# Altium PCB ICAN-7006-AiUi.PcbDoc
Units mm, origin at the board's own origin, x right, y up, seen from the top; angles counter-clockwise.
Board outline 118 x 80 mm, 2 copper layers (Top Layer, Bottom Layer); 50 components, 68 nets, 272 pads, 0 vias.
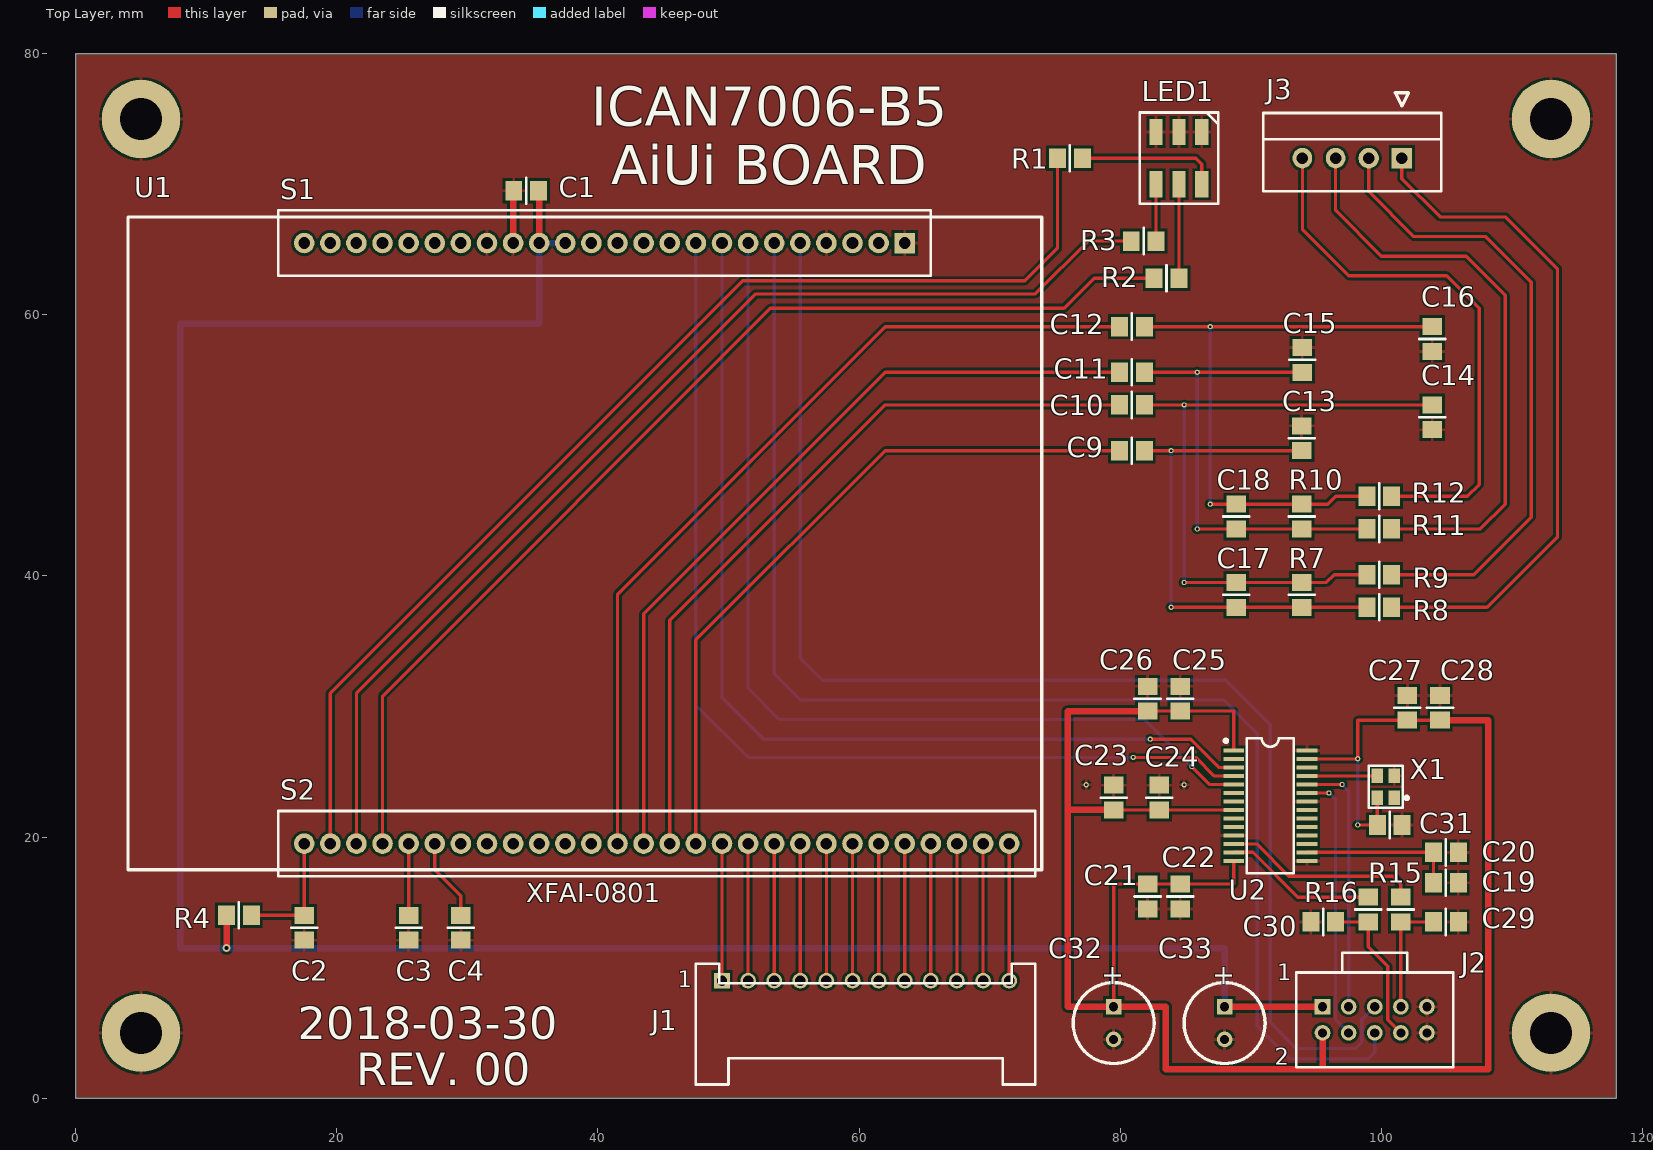
[diagram p0: Top Layer view]
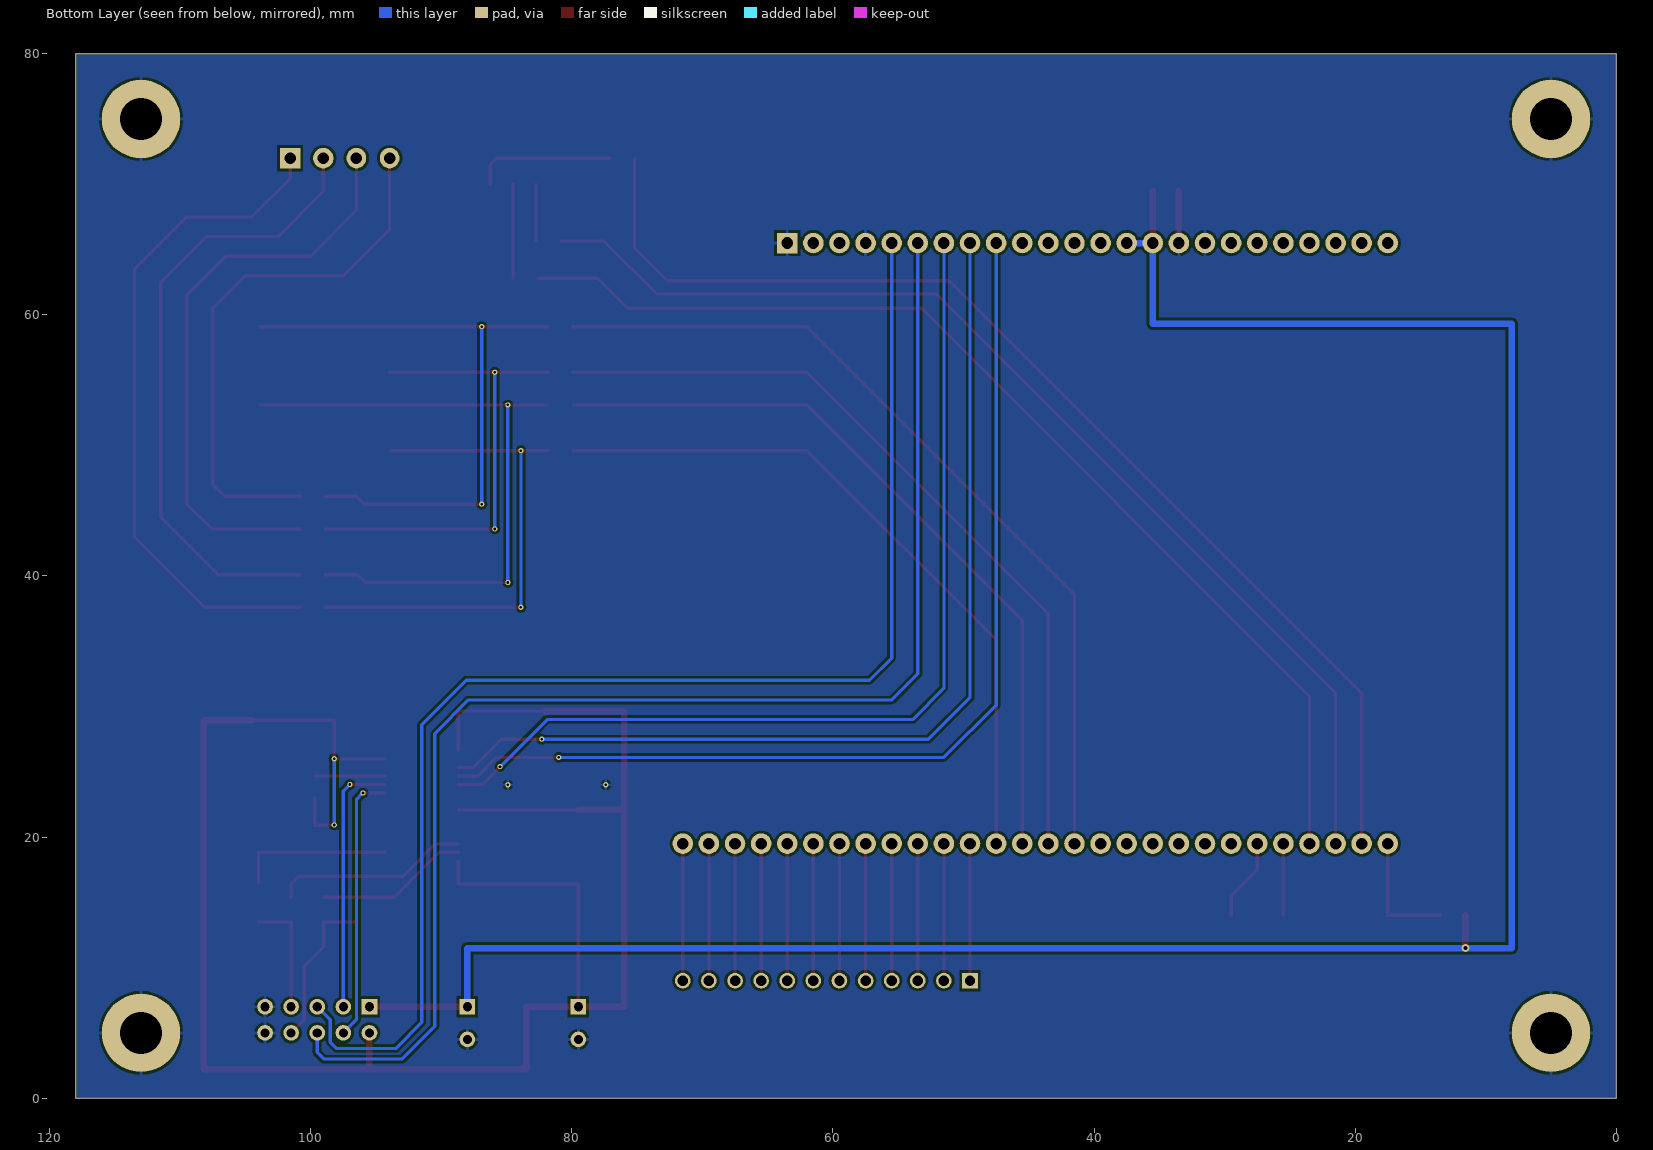
[diagram p1: Bottom Layer view, seen from below]

## Layer stack, top to bottom
Top Layer: signal copper 0.0356
Dielectric: dielectric 0.32, FR-4, Dk 4.8
Bottom Layer: signal copper 0.0356

## Board outline
0,0 0,80 118,80 118,0

## Design rules (kind name [scope] priority, off if disabled: settings)
Clearance [All] p1: gap=0.2
ComponentClearance [All] p1: gap=0.2 collisioncheckmode=3 verticalgap=0.2
HoleSize [All] p1: absolutevalues=TRUE maxlimit=8 minlimit=0.025 maxpercent=80.000 minpercent=20.000
PolygonConnect [All] p1: connectstyle=Relief reliefconductorwidth=0.254 reliefentries=4 polygonreliefangle="90 Angle"
RoutingVias [All] p1: holewidth=0.2 width=0.4 viastyle="Through Hole" minholewidth=0.2 minwidth=0.4 maxholewidth=4 maxwidth=8
SolderMaskExpansion [All] p1: expansion=0.102
TestPointUsage [All] p1: valid=0 allowmultiple=FALSE
Testpoint [All] p1: side=15 testpointundercomponent=TRUE minsize=1.016 maxsize=2.54 preferedsize=1.524 minholesize=0 maxholesize=1.016 preferedholesize=0.813 testpointgrid=0.025 style=1023 order=0-112345678
Width [All] p1: maxlimit=2 minlimit=0.2 preferedwidth=0.254
17 further rules are at their usual default settings.

## Components (designator, comment, footprint, x,y, rotation, side; value= is the part's Value field where it differs from the comment)
C1 "10uF" [0805]2012 34.5,69.5 r180 top
C2 "100nF" [0805]2012 17.5,13.05 r90 top
C3 "100nF" [0805]2012 25.5,13.05 r90 top
C4 "100nF" [0805]2012 29.5,13.05 r90 top
C9 "1uF" [0805]2012 80.9,49.6 r0 top
C10 "1uF" [0805]2012 80.9,53.1 r0 top
C11 "1uF" [0805]2012 80.9,55.6 r0 top
C12 "1uF" [0805]2012 80.9,59.1 r0 top
C13 "1nF" [0805]2012 93.9,50.55 r270 top
C14 "1nF" [0805]2012 103.9,52.15 r90 top
C15 "1nF" [0805]2012 93.95,56.55 r270 top
C16 "1nF" [0805]2012 103.9,58.15 r90 top
C17 "1nF" [0805]2012 88.9,38.55 r270 top
C18 "1nF" [0805]2012 88.9,44.55 r270 top
C19 "0.1uF" [0805]2012 104.95,16.5 r180 top
C20 "10uF" [0805]2012 104.95,18.825 r180 top
C21 "0.1uF" [0805]2012 82.1,15.45 r90 top
C22 "10uF" [0805]2012 84.6,15.45 r90 top
C23 "0.1uF" [0805]2012 79.5,23.025 r270 top
C24 "10uF" [0805]2012 83,23.025 r270 top
C25 "0.1uF" [0805]2012 84.6,30.6 r270 top
C26 "10uF" [0805]2012 82.1,30.6 r270 top
C27 "0.1uF" [0805]2012 102,29.9 r270 top
C28 "10uF" [0805]2012 104.5,29.9 r270 top
C29 "2.2nF" [0805]2012 104.95,13.5 r180 top
C30 "2.2nF" [0805]2012 95.55,13.5 r0 top
C31 "0.01uF" [0805]2012 100.65,20.925 r180 top
C32 "47uF/25V" "Capa MH5 PITCH2.5mm" 79.5,5.75 r270 top
C33 "47uF/25V" "Capa MH5 PITCH2.5mm" 88,5.75 r270 top
J1 "YH 12P" HY-12AW 60.5,9 r0 top
J2 "PHSD 10P" "PHSD WV05x2" 99.5,6 r0 top
J3 "C3 4P" C3-S4 101.58,72 r0 top
LED1 "GB-T500RGB" "LED SMD RGB" 84.5,72 r270 top
R1 "2.2k,1/4W" [0805]2012 76.15,72 r180 top
R2 "3k,1/4W" [0805]2012 83.55,62.8 r180 top
R3 "2.2k,1/4W" [0805]2012 81.8,65.65 r180 top
R4 "100k,1/8W" [0805]2012 12.5,14 r0 top
R7 "1k,1/8W" [0805]2012 93.9,38.55 r270 top
R8 "10k,1/8W" [0805]2012 99.85,37.6 r0 top
R9 "10k,1/8W" [0805]2012 99.85,40.1 r0 top
R10 "1k,1/8W" [0805]2012 93.9,44.55 r270 top
R11 "10k,1/8W" [0805]2012 99.85,43.6 r0 top
R12 "10k,1/8W" [0805]2012 99.85,46.1 r0 top
R15 "470,1/4W" [0805]2012 101.5,14.45 r270 top
R16 "470,1/4W" [0805]2012 99,14.45 r270 top
S1 "SOCKET 24P" "CONN 2.0mm X 24" 36.5,65.5 r270 top
S2 "SOCKET 28P" "CONN 2.0mm X 28" 44.5,19.5 r270 top
U1 "XFAI-0801" XFAI-0801 44.5,42.5 r270 top
U2 "TLV320AIC23BIPW" "PW 28p" 91.5,22.4 r270 top
X1 "SG-210STF 12.00MHz" "XTAL SPXO" 100.35,23.85 r90 top

## Footprints (in the part's own frame and the unit in brackets; to place one, negate y for a bottom-side part, rotate by r counter-clockwise, add the part's x,y. Pads: shape width x height; smd on the part's side, far side on the other; paste and mask are expansions set on the pad)
[0805]2012 [mm] "SMD 2.0x1.25"
  rect 1.3x1.5 smd: 1(-0.95,0) 2(0.95,0)
  silkscreen extent 0,-1 0,1
C3-S4 [mm] "2.54"
  rect 1.575x1.575 hole 0.89: 1(0,0)
  round 1.575 hole 0.89: 2(-2.54,0)
  oval 1.5x1.575 hole 0.89: 3(-5.08,0) 4(-7.62,0)
  silkscreen extent -10.62,-2.54 3,5
"Capa MH5 PITCH2.5mm" [mm] "Capacitor, Electrolytic, Radial; Body 6.3 mm (Dia.xH typ); Pin Spacing 2.5 mm (typ)"
  rect 1.2x1.2 hole 0.7: 1(-1.25,0)
  round 1.2 hole 0.7: 2(1.25,0)
  silkscreen extent -3.1,-3.1 3.1,3.1
"CONN 2.0mm X 24" [mm]
  round 1.575 hole 0.89: 1(0,27) 2(0,25) 3(0,23) 4(0,21) 5(0,19) 6(0,17) 7(0,15) 8(0,13) 9(0,11) 10(0,9) 11(0,7) 12(0,5) 13(0,3) 14(0,1) 15(0,-1) 16(0,-3) 17(0,-5) 18(0,-7) 19(0,-9) 20(0,-11) 21(0,-13) 22(0,-15) 23(0,-17) 24(0,-19)
  silkscreen extent -2.5,-21 2.5,29
"CONN 2.0mm X 28" [mm]
  round 1.575 hole 0.89: 1(0,27) 2(0,25) 3(0,23) 4(0,21) 5(0,19) 6(0,17) 7(0,15) 8(0,13) 9(0,11) 10(0,9) 11(0,7) 12(0,5) 13(0,3) 14(0,1) 15(0,-1) 16(0,-3) 17(0,-5) 18(0,-7) 19(0,-9) 20(0,-11) 21(0,-13) 22(0,-15) 23(0,-17) 24(0,-19) 25(0,-21) 26(0,-23) 27(0,-25) 28(0,-27)
  silkscreen extent -2.5,-29 2.5,29
HY-12AW [mm] "YOLINK PHB CONNECTOR A2006-xxA 2.00mm"
  rect 1.2x1.2 hole 0.8: 1(-11,0)
  round 1.2 hole 0.8: 2(-9,0) 3(-7,0) 4(-5,0) 5(-3,0) 6(-1,0) 7(1,0) 8(3,0) 9(5,0) 10(7,0) 11(9,0) 12(11,0)
  silkscreen extent -13,-7.95 13,1.3
"LED SMD RGB" [mm] "Body 5x5mm 3LED"
  rect 2x1 smd: 1(-2,1.75) 2(-2,0) 3(-2,-1.75) 4(2,-1.75) 5(2,0) 6(2,1.75)
  silkscreen extent -3.5,-3 3.5,3
"PHSD WV05x2" [mm] "YOLINK PHSD CONNECTOR A2006-WVxxX2 2.00mm"
  rect 1.2x1.2 hole 0.7: 1(-4,1)
  round 1.2 hole 0.7: 2(-4,-1) 3(-2,1) 4(-2,-1) 5(0,1) 6(0,-1) 7(2,1) 8(2,-1) 9(4,1) 10(4,-1)
  silkscreen extent -6,-3.62 6,5.13
"PW 28p" [mm] "pitch 0.65mm TI"
  rect 0.3x1.6 smd: 1(-4.225,-2.8) 2(-3.575,-2.8) 3(-2.925,-2.8) 4(-2.275,-2.8) 5(-1.625,-2.8) 6(-0.975,-2.8) 7(-0.325,-2.8) 8(0.325,-2.8) 9(0.975,-2.8) 10(1.625,-2.8) 11(2.275,-2.8) 12(2.925,-2.8) 13(3.575,-2.8) 14(4.225,-2.8) 15(4.225,2.8) 16(3.575,2.8) 17(2.925,2.8) 18(2.275,2.8) 19(1.625,2.8) 20(0.975,2.8) 21(0.325,2.8) 22(-0.325,2.8) 23(-0.975,2.8) 24(-1.625,2.8) 25(-2.275,2.8) 26(-2.925,2.8) 27(-3.575,2.8) 28(-4.225,2.8)
  silkscreen extent -5.18,-3.52 5.17,1.8
XFAI-0801 [mm]
  rect 1.575x1.575 hole 0.89: 1(-23,19)
  round 1.575 hole 0.89: 2(-23,17) 3(-23,15) 4(-23,13) 5(-23,11) 6(-23,9) 7(-23,7) 8(-23,5) 9(-23,3) 10(-23,1) 11(-23,-1) 12(-23,-3) 13(-23,-5) 14(-23,-7) 15(-23,-9) 16(-23,-11) 17(-23,-13) 18(-23,-15) 19(-23,-17) 20(-23,-19) 21(-23,-21) 22(-23,-23) 23(-23,-25) 24(-23,-27) 25(23,-27) 26(23,-25) 27(23,-23) 28(23,-21) 29(23,-19) 30(23,-17) 31(23,-15) 32(23,-13) 33(23,-11) 34(23,-9) 35(23,-7) 36(23,-5) 37(23,-3) 38(23,-1) 39(23,1) 40(23,3) 41(23,5) 42(23,7) 43(23,9) 44(23,11) 45(23,13) 46(23,15) 47(23,17) 48(23,19) 49(23,21) 50(23,23) 51(23,25) 52(23,27)
  silkscreen extent -25,-40.5 25,29.5
"XTAL SPXO" [mm] "EPSON SG-210STF"
  rect 1.1x0.9 smd: 1(-0.85,-0.65) 2(0.85,-0.65) 3(0.85,0.65) 4(-0.85,0.65)
  silkscreen extent -1.6,-1.73 1.6,1.3

## Part data
C1 C2 C3 C4 C9 C10 C11 C12 C13 C14 C15 C16 C17 C18 C31: library part "Cap Semi", "Capacitor (Semiconductor SIM Model)"
C19 C20 C21 C22 C23 C24 C25 C26 C27 C28 C29 C30: library part "Cap Semi", "Capacitor"
C32 C33: library part "Cap Pol2", "Polarized Capacitor (Axial)"
J1: library part "Header 20", "Header, 20-Pin"
J2 J3: library part "Header 4", "Header, 4-Pin"
LED1: "LED RGB"
R1 R2 R3 R4 R7 R8 R9 R10 R11 R12 R15 R16: library part Res3, "Resistor"
S1 S2: "IC SOCKET"
U2: library part IC28, "DAC"
X1: library part IC4, "Crystal oscilator"

## Free pads (board coordinates)
  round 6 hole 3.2: 0(5,5) 0(5,75) 0(113,5) 0(113,75)
  round 0.6 hole 0.3: 0(11.55,11.5)
  round 0.4 hole 0.2: 0(77.4,24) 0(81,26.1) 0(82.3,27.5) 0(83.9,37.6) 0(83.9,49.6) 0(84.9,39.5) 0(84.9,53.1) 0(84.9,24) 0(85.5,25.4) 0(85.9,43.6) 0(85.9,55.6) 0(86.9,45.5) 0(86.9,59.1) 0(96,23.375) 0(97,24.025) 0(98.2,20.925) 0(98.2,26)

## Nets (pads, with @x,y where several pads share a name; then routed paths per layer and width w, separated by ;. In a path a pad name is that pad's centre, name@x,y a point inside that pad or via, vN(x,y) a via of type N, cw(c..) or ccw(c..) an arc to the next point about the centre after c; other vN are vias at no path point)
DC3.3V: C21.2 C22.2 C23.2 C24.2 C25.2 C26.2 C27.2 C28.2 C31.2 C32.1 J2.2 pad.0@98.2,20.925 pad.0@98.2,26 U2.1 U2.8 U2.14 U2.27 X1.4 | length 163.4
  Top Layer w0.254: C32.1 79.5,16.3 ; 79.5,16.4 88.7,16.4 U2.14 ; C23.2 U2.8 ; C26.2 88.7,29.65 U2.1 ; U2.27 98.2,25.975 98.2,28.95 C28.2 ; pad.0@98.2,20.925 C31.2 X1.4
  Top Layer w0.5: 76,22.075 C23.2 ; C26.2 76,29.65 76,7 83.5,7 83.5,2.2 108.2,2.2 108.2,28.95 C28.2 ; 95.5,2.2 J2.2
  Bottom Layer w0.254: pad.0@98.2,20.925 pad.0@98.2,26
DC5V: C1.1 C33.1 J2.1 pad.0@11.55,11.5 R4.1 S1.14 S1.15 U1.14 U1.15 | length 182
  Top Layer w0.5: pad.0@11.55,11.5 R4.1 ; U1.15 C1.1@35.5,69.5 ; C33.1 J2.1
  Bottom Layer w0.5: U1.14 U1.15 35.5,59.3 8,59.3 8,11.498 88,11.498 C33.1
GND: C1.2 C2.1 C3.1 C4.1 C13.1 C14.1 C15.1 C16.1 C19.1 C20.1 C21.1 C22.1 C23.1 C24.1 C25.1 C26.1 C27.1 C28.1 C29.1 C30.1 C31.1 C32.2 C33.2 J2.9 J2.10 LED1.1 LED1.2 LED1.3 pad.0@5,5 pad.0@5,75 pad.0@77.4,24 pad.0@84.9,24 pad.0@113,5 pad.0@113,75 S1.1 S1.4 S1.16 S1.17 U1.1 U1.4 U1.16 U1.17 U2.11 U2.15 U2.22 U2.28 X1.2 | length 4
  Top Layer w0.5: U1.16 C1.2@33.5,69.5
I2C_SCL2: J2.3 pad.0@97,24.025 U2.24 | length 19.9
  Top Layer w0.254: U2.24 pad.0@97,24.025
  Bottom Layer w0.254: pad.0@97,24.025 97.5,23.525 J2.3
I2C_SDA2: J2.4 pad.0@96,23.375 U2.23 | length 20.7
  Top Layer w0.254: U2.23 pad.0@96,23.375
  Bottom Layer w0.254: pad.0@96,23.375 96.5,22.875 96.5,6 J2.4
NetC2_2: C2.2 R4.2 S2.28 U1.25 | length 9.5
  Top Layer w0.254: R4.2 C2.2 U1.25
NetC3_2: C3.2 S2.24 U1.29 | length 5.5
  Top Layer w0.254: C3.2 U1.29
NetC4_2: C4.2 S2.23 U1.30 | length 6.3
  Top Layer w0.254: U1.30 27.5,17.5 29.5,15.5 C4.2
NetC9_1: C9.1 S2.13 U1.40 | length 54.1
  Top Layer w0.254: U1.40 47.5,35.1 62,49.6 C9.1
NetC9_2: C9.2 C13.2 C17.2 pad.0@83.9,37.6 pad.0@83.9,49.6 R7.2 R8.1 | length 39.1
  Top Layer w0.254: C9.2 C13.2 ; pad.0@83.9,37.6 R8.1
  Bottom Layer w0.254: pad.0@83.9,37.6 pad.0@83.9,49.6
NetC10_1: C10.1 S2.14 U1.39 | length 58.4
  Top Layer w0.254: U1.39 45.5,36.6 62,53.1 C10.1
NetC10_2: C10.2 C14.2 C17.1 pad.0@84.9,39.5 pad.0@84.9,53.1 R7.1 R9.1 | length 49.8
  Top Layer w0.254: C10.2 C14.2 ; pad.0@84.9,39.5 R7.1@93.8,39.5 ; R7.1 95.8,39.5 96.4,40.1 R9.1
  Bottom Layer w0.254: pad.0@84.9,39.5 pad.0@84.9,53.1
NetC11_1: C11.1 S2.15 U1.38 | length 61.7
  Top Layer w0.254: U1.38 43.5,37.1 62,55.6 C11.1
NetC11_2: C11.2 C15.2 C18.2 pad.0@85.9,43.6 pad.0@85.9,55.6 R10.2 R11.1 | length 37.1
  Top Layer w0.254: C11.2 C15.2 ; pad.0@85.9,43.6 R11.1
  Bottom Layer w0.254: pad.0@85.9,43.6 pad.0@85.9,55.6
NetC12_1: C12.1 S2.16 U1.37 | length 66
  Top Layer w0.254: U1.37 41.5,38.6 62,59.1 C12.1
NetC12_2: C12.2 C16.2 C18.1 pad.0@86.9,45.5 pad.0@86.9,59.1 R10.1 R12.1 | length 47.9
  Top Layer w0.254: C12.2 C16.2 ; pad.0@86.9,45.5 95.9,45.5 96.5,46.1 R12.1
  Bottom Layer w0.254: pad.0@86.9,45.5 pad.0@86.9,59.1
NetC19_2: C19.2 C20.2 U2.16 | length 12
  Top Layer w0.254: U2.16 C20.2 C19.2
NetC29_2: C29.2 J2.7 R15.2 | length 9
  Top Layer w0.254: J2.7 R15.2 C29.2
NetC30_2: C30.2 J2.8 R16.2 | length 12
  Top Layer w0.254: C30.2 R16.2 99,11.6 100.5,10.1 100.5,6 J2.8
NetJ1_1: J1.1 S2.12 U1.41 | length 10.5
  Top Layer w0.254: J1.1 U1.41
NetJ1_2: J1.2 S2.11 U1.42 | length 10.5
  Top Layer w0.254: J1.2 U1.42
NetJ1_3: J1.3 S2.10 U1.43 | length 10.5
  Top Layer w0.254: J1.3 U1.43
NetJ1_4: J1.4 S2.9 U1.44 | length 10.5
  Top Layer w0.254: J1.4 U1.44
NetJ1_5: J1.5 S2.8 U1.45 | length 10.5
  Top Layer w0.254: J1.5 U1.45
NetJ1_6: J1.6 S2.7 U1.46 | length 10.5
  Top Layer w0.254: J1.6 U1.46
NetJ1_7: J1.7 S2.6 U1.47 | length 10.5
  Top Layer w0.254: J1.7 U1.47
NetJ1_8: J1.8 S2.5 U1.48 | length 10.5
  Top Layer w0.254: J1.8 U1.48
NetJ1_9: J1.9 S2.4 U1.49 | length 10.5
  Top Layer w0.254: J1.9 U1.49
NetJ1_10: J1.10 S2.3 U1.50 | length 10.5
  Top Layer w0.254: J1.10 U1.50
NetJ1_11: J1.11 S2.2 U1.51 | length 10.5
  Top Layer w0.254: J1.11 U1.51
NetJ1_12: J1.12 S2.1 U1.52 | length 10.5
  Top Layer w0.254: J1.12 U1.52
NetJ3_1: J3.1 R8.2 | length 51.8
  Top Layer w0.254: R8.2 108.1,37.6 113.5,43 113.5,63.5 109.5,67.5 104.5,67.5 101.58,70.42 J3.1
NetJ3_2: J3.2 R9.2 | length 48.4
  Top Layer w0.254: J3.2 99.04,69.46 102.5,66 108,66 111.5,62.5 111.5,44.5 107.1,40.1 R9.2
NetJ3_3: J3.3 R11.2 | length 45.2
  Top Layer w0.254: J3.3 96.5,68 100,64.5 106.5,64.5 109.5,61.5 109.5,45.5 107.6,43.6 R11.2
NetJ3_4: J3.4 R12.2 | length 42.1
  Top Layer w0.254: J3.4 93.96,66.54 97.5,63 105,63 107.5,60.5 107.5,47 106.6,46.1 R12.2
NetLED1_4: LED1.4 R3.1 | length 4.4
  Top Layer w0.254: R3.1 LED1.4
NetLED1_5: LED1.5 R2.1 | length 7.2
  Top Layer w0.254: R2.1 LED1.5
NetLED1_6: LED1.6 R1.1 | length 10.9
  Top Layer w0.254: R1.1 85.8,72 86.25,71.55 LED1.6
NetR1_2: R1.2 S2.27 U1.26 | length 88.2
  Top Layer w0.254: U1.26 19.5,31 51.1,62.6 72.7,62.6 75.2,65.1 R1.2
NetR2_2: R2.2 S2.25 U1.28 | length 83.7
  Top Layer w0.254: U1.28 23.5,30.8 53.2,60.5 75.7,60.5 78,62.8 R2.2
NetR3_2: R3.2 S2.26 U1.27 | length 85.2
  Top Layer w0.254: U1.27 21.5,31 52.1,61.6 73.5,61.6 77.55,65.65 R3.2
NetS1_2: S1.2 U1.2
NetS1_3: S1.3 U1.3
NetS1_10: S1.10 U1.10
NetS1_11: S1.11 U1.11
NetS1_12: S1.12 U1.12
NetS1_13: S1.13 U1.13
NetS1_20: S1.20 U1.20
NetS1_21: S1.21 U1.21
NetS1_22: S1.22 U1.22
NetS1_23: S1.23 U1.23
NetS1_24: S1.24 U1.24
NetS2_17: S2.17 U1.36
NetS2_18: S2.18 U1.35
NetS2_19: S2.19 U1.34
NetS2_20: S2.20 U1.33
NetS2_21: S2.21 U1.32
NetS2_22: S2.22 U1.31
NetU2_25: U2.25 X1.3 | length 5.4
  Top Layer w0.254: U2.25 X1.3@99.7,24.675
PCM-CK: pad.0@82.3,27.5 S1.8 U1.8 U2.3 | length 76.2
  Top Layer w0.254: pad.0@82.3,27.5 85.4,27.5 87.575,25.325 U2.3
  Bottom Layer w0.254: U1.8 49.5,30.7 52.7,27.5 pad.0@82.3,27.5
PCM-DI: pad.0@81,26.1 S1.9 U1.9 U2.4 | length 78.8
  Top Layer w0.254: pad.0@81,26.1 85.8,26.1 87.225,24.675 U2.4
  Bottom Layer w0.254: U1.9 47.5,30.1 51.5,26.1 pad.0@81,26.1
PCM-LRCK: pad.0@85.5,25.4 S1.7 U1.7 U2.5 | length 74.4
  Top Layer w0.254: pad.0@85.5,25.4 86.875,24.025 U2.5
  Bottom Layer w0.254: U1.7 51.5,31.4 53.9,29 81.9,29 pad.0@85.5,25.4
SPK-L: R15.1 U2.12 | length 15.1
  Top Layer w0.254: U2.12 90.45,19.475 92.925,17 100.9,17 101.5,16.4 R15.1
SPK-R: R16.1 U2.13 | length 11.7
  Top Layer w0.254: U2.13 90.175,18.825 93.6,15.4 R16.1
UART0-RXD: S1.19 U1.19
UART0-TXD: S1.18 U1.18
UART1-RXD: J2.5 S1.5 U1.5 | length 103.9
  Bottom Layer w0.254: U1.5 55.5,33.7 57.2,32 88.1,32 91.5,28.6 91.5,5.8 93.5,3.8 98,3.8 98.5,4.3 98.5,6 J2.5
UART1-TXD: J2.6 S1.6 U1.6 | length 106.1
  Bottom Layer w0.254: U1.6 53.5,32.5 55.5,30.5 87.917,30.5 90.5,27.917 90.5,5.5 93,3 99,3 99.5,3.5 J2.6
pads on no net: U2.2 U2.6 U2.7 U2.9 U2.10 U2.17 U2.18 U2.19 U2.20 U2.21 U2.26 X1.1

## Polygon pours and split planes (outlines as drawn)
GND on Top Layer "Top Layer-No Net" (solid, pour order 1000): 0.127,0.127 117.873,0.127 117.873,79.873 0.127,79.873
GND on Bottom Layer "Bottom Layer-No Net" (solid, pour order 1001): 0.127,0.127 117.873,0.127 117.873,79.873 0.127,79.873

## Silkscreen, mask and mechanical layers (free items; w line width, h text height)
Top Overlay:
  text "ICAN7006-B5" at 39.5,74.5 h3
  text "AiUi BOARD" at 41,70 h3
  text "XFAI-0801" at 34.5,14.5 h2.5
  text "2018-03-30" at 17,4.5 h2.5
  text "REV. 00" at 21.5,1 h2.5
Mechanical 13:
  lines w0.254: 0.324,85.738 0.324,86.246 ; 1.848,85.484 0.324,85.992 ; 1.848,86.5 0.324,85.992 ; 4.924,83.138 4.924,83.646 ; 6.448,82.884 4.924,83.392 ; 6.448,83.9 4.924,83.392 ; 53.185,83.392 4.924,83.392 ; 53.712,85.992 0.324,85.992 ; 64.663,83.392 112.924,83.392 ; 64.936,85.992 118.324,85.992 ; 111.4,82.884 112.924,83.392 ; 111.4,83.9 112.924,83.392 ; 112.924,83.138 112.924,83.646 ; 116.8,85.484 118.324,85.992 ; 116.8,86.5 118.324,85.992 ; 118.324,85.738 118.324,86.246 ; 119.292,6.624 119.8,5.1 ; 119.292,73.576 119.8,75.1 ; 119.546,5.1 120.054,5.1 ; 119.546,75.1 120.054,75.1 ; 119.8,34.996 119.8,5.1 ; 119.8,45.204 119.8,75.1 ; 120.308,6.624 119.8,5.1 ; 120.308,73.576 119.8,75.1 ; 122.392,1.428 122.9,-0.096 ; 122.392,78.38 122.9,79.904 ; 122.646,-0.096 123.154,-0.096 ; 122.646,79.904 123.154,79.904 ; 122.9,34.8 122.9,-0.096 ; 122.9,45.008 122.9,79.904 ; 123.408,1.428 122.9,-0.096 ; 123.408,78.38 122.9,79.904 ; 0,0 0,80 118,80 118,0 0,0
  text "118 (mm)" at 53.966,85.078 h1.52
  text "108 (mm)" at 53.439,82.478 h1.52
  text "70 (mm)" at 120.714,35.25 h1.52 r90
  text "80 (mm)" at 123.814,35.054 h1.52 r90

## Text inside footprints (layer, text, board x,y; h text height)
C32: Top Overlay "+" at 78.8,10.25 h1.52 r270
C33: Top Overlay "+" at 87.3,10.25 h1.52 r270
J1: Top Overlay "1" at 46.1,8.5 h1.27
J2: Top Overlay "1" at 92.05,9.025 h1.27; Top Overlay "2" at 91.85,2.575 h1.27